# Altium PCB board.PcbDoc
Units mil, origin at the board's own origin, x right, y up, seen from the top; angles counter-clockwise.
Board outline 2980 x 2100 mil, 2 copper layers (Top Layer, Bottom Layer); 173 components, 98 nets, 438 pads, 89 vias.
Unrouted connection lines stored in the file: 3.
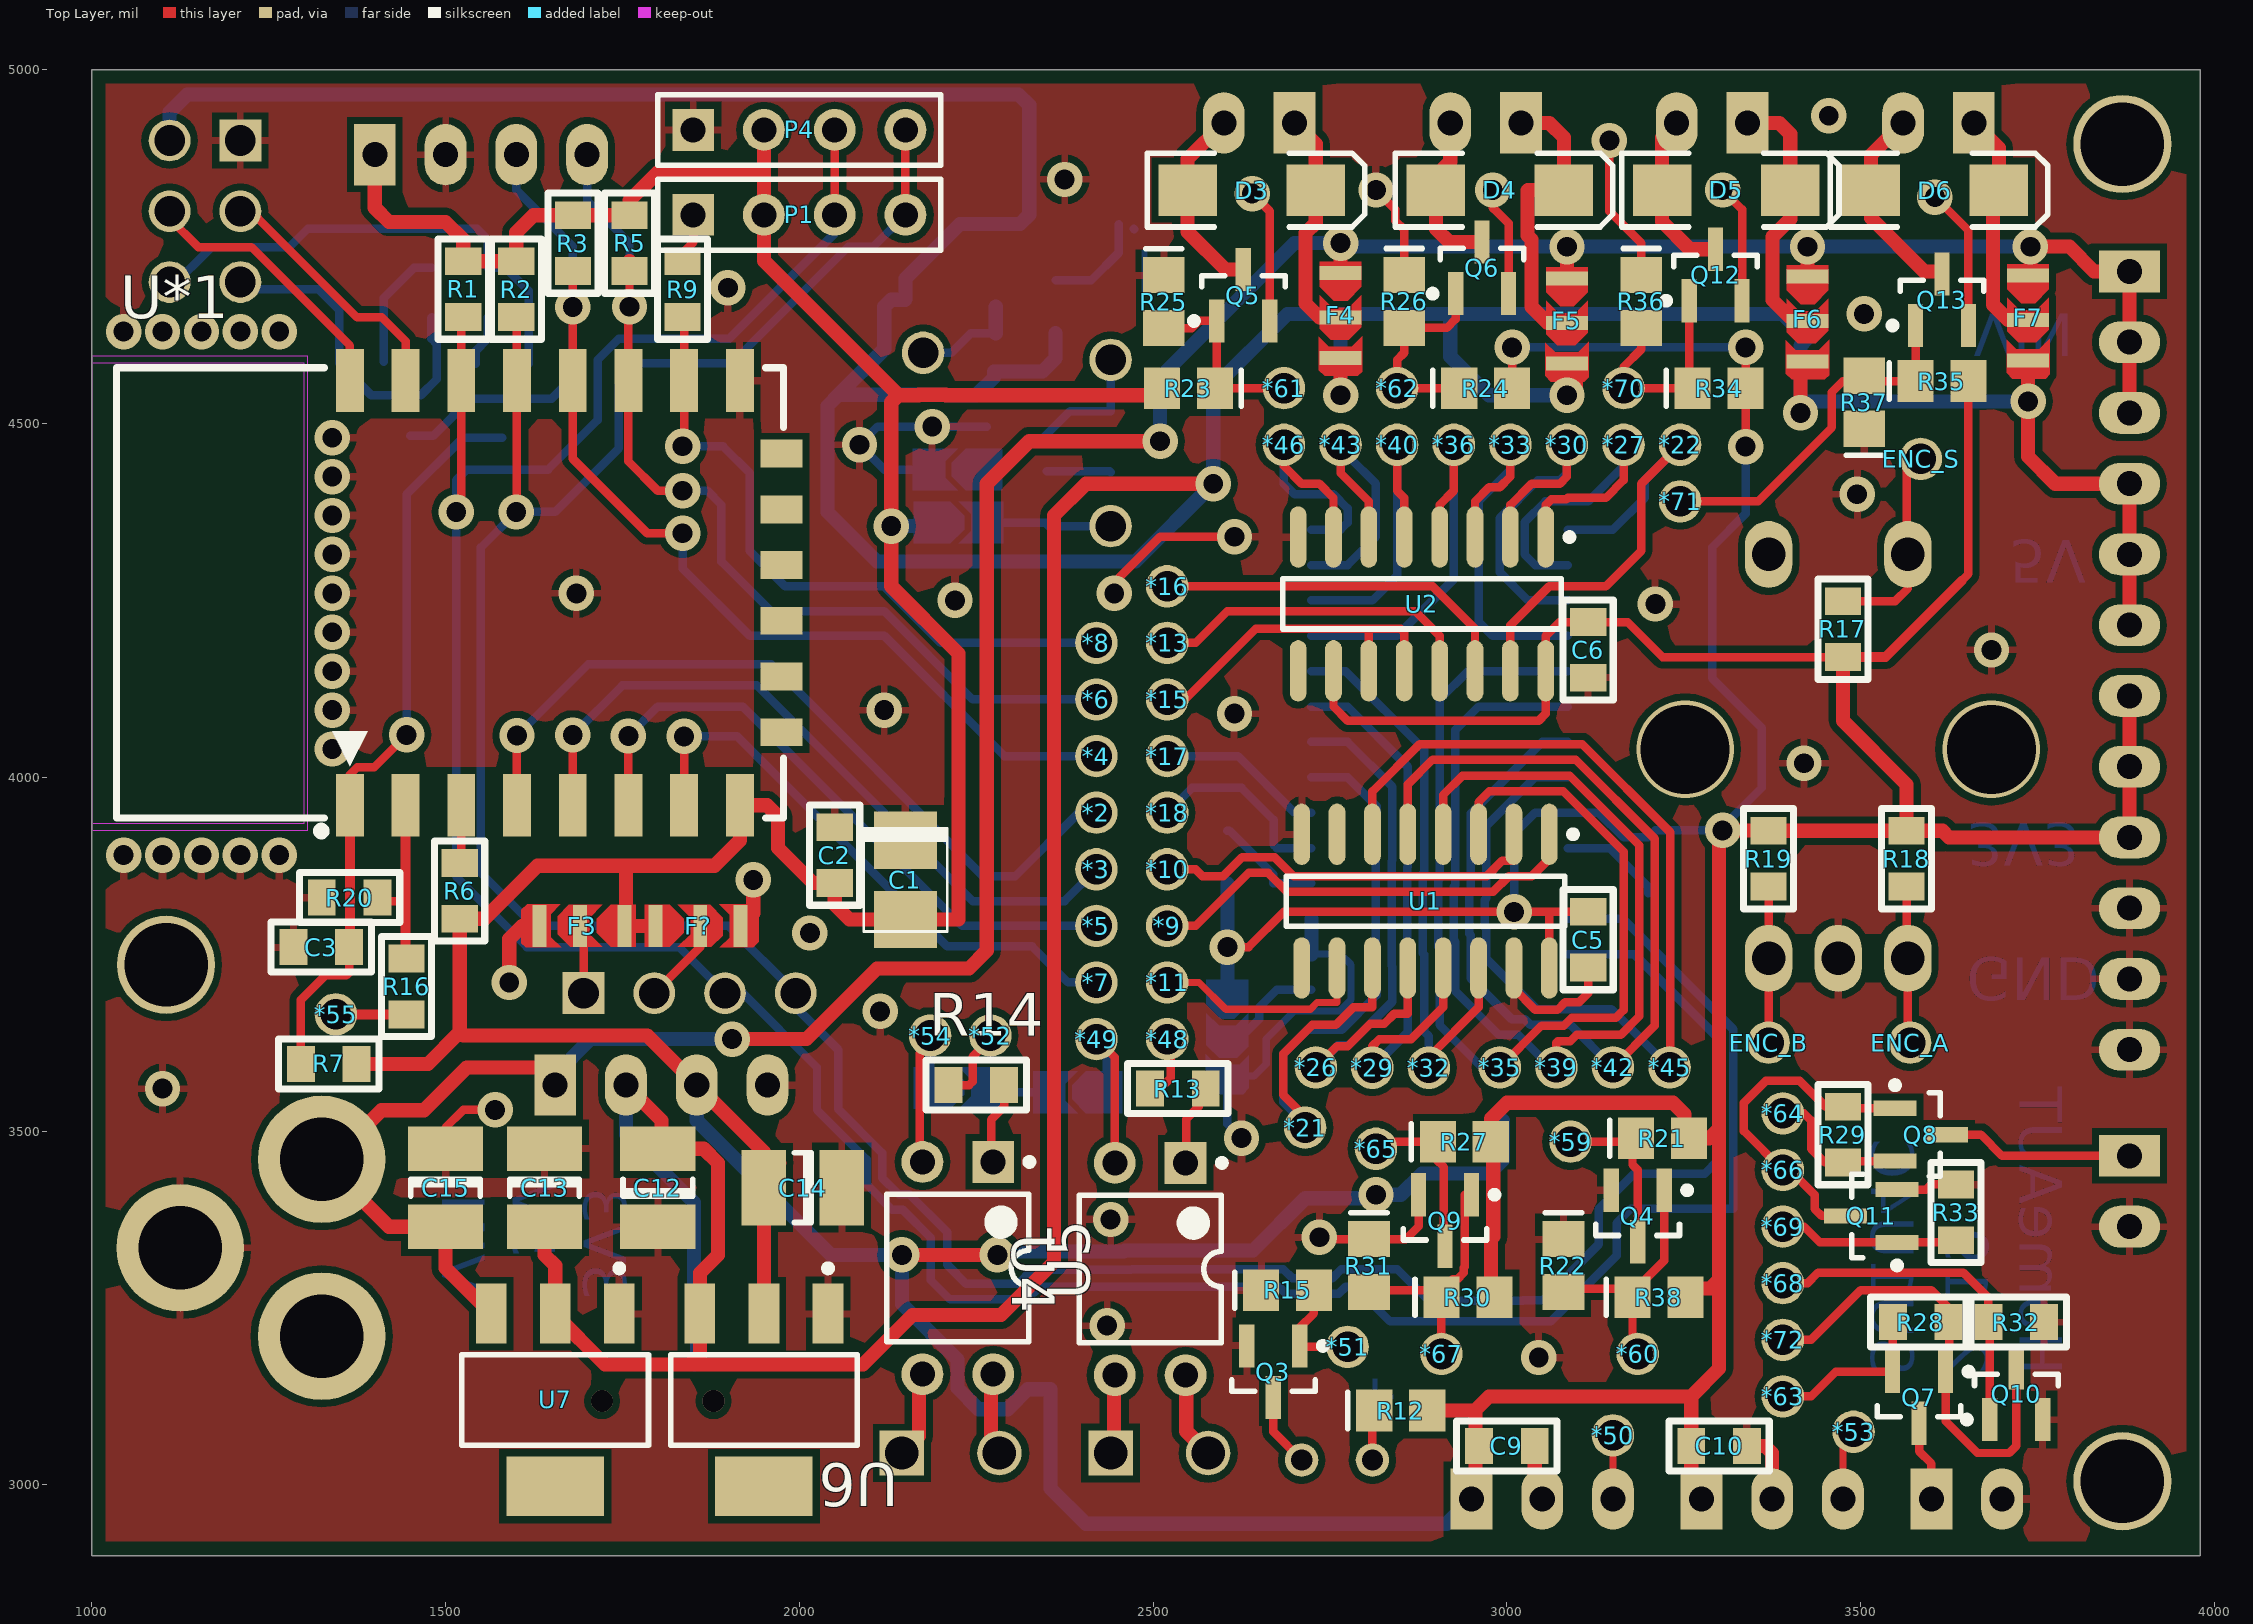
[diagram p0: Top Layer view]
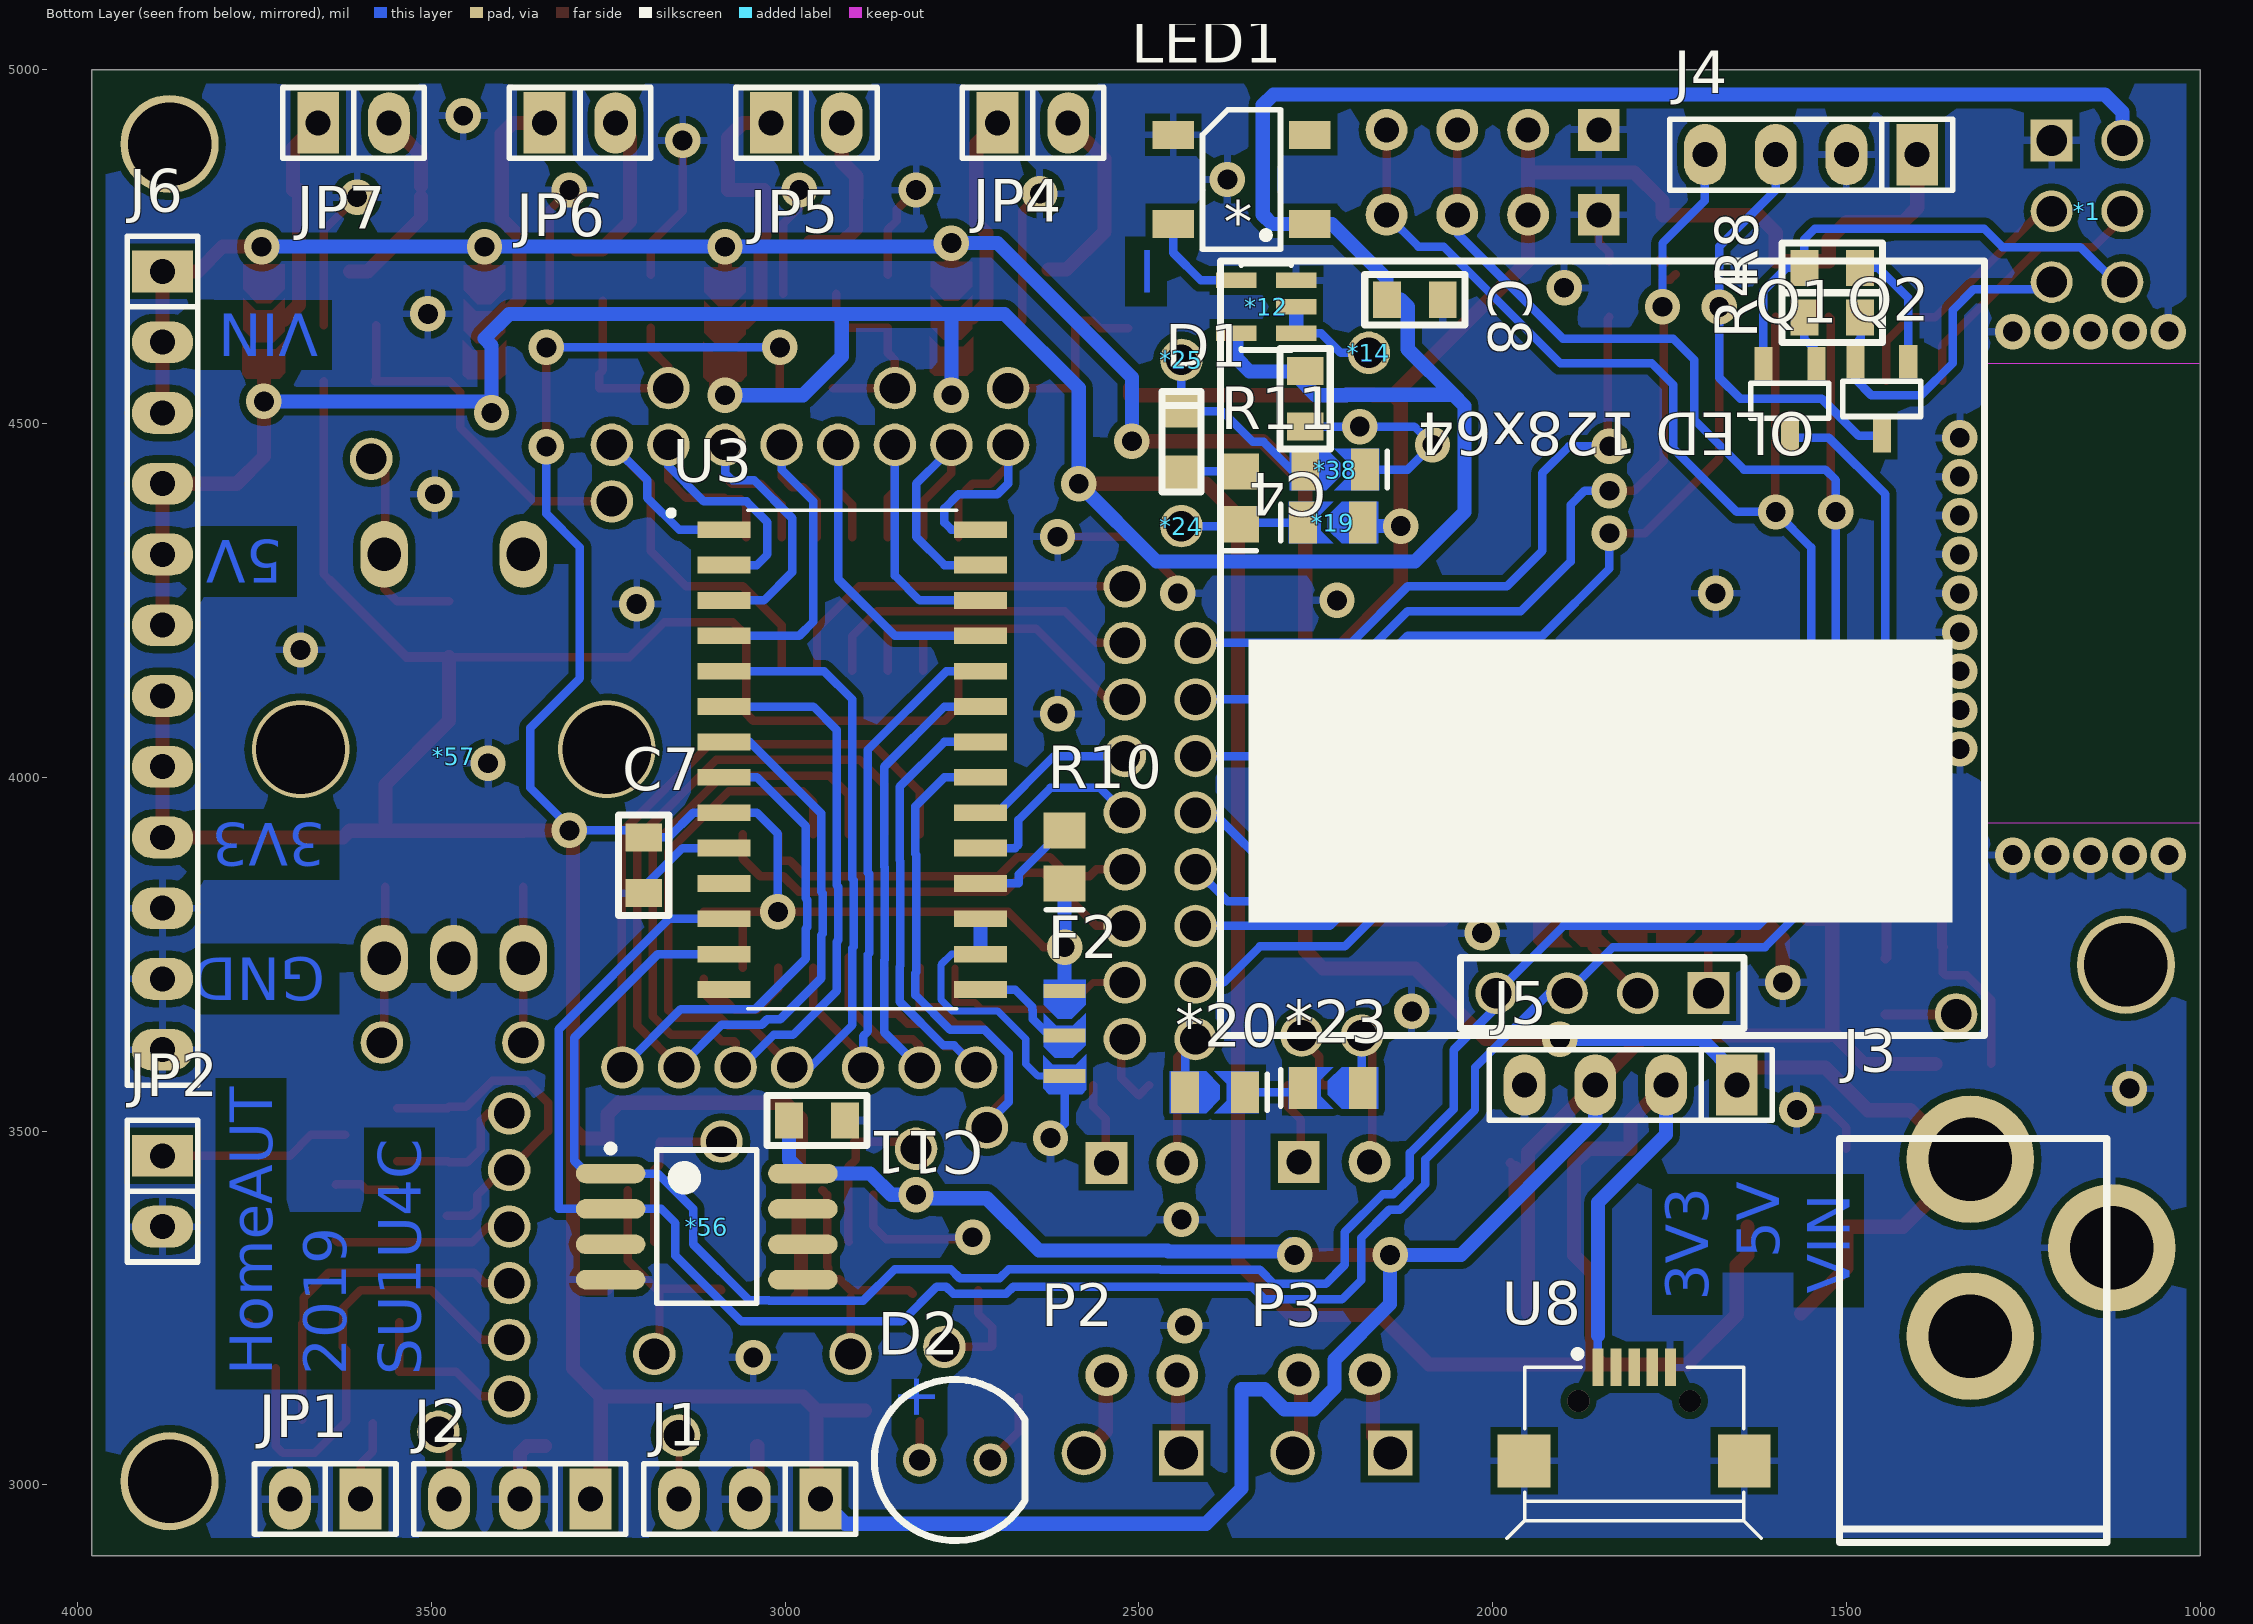
[diagram p1: Bottom Layer view, seen from below]

## Layer stack, top to bottom
Top Solder: solder mask 0.4, Solder Resist, Dk 3.5
Top Layer: signal copper 1.4
Dielectric 1: dielectric 12.6, FR-4, Dk 4.8
Bottom Layer: signal copper 1.4
Bottom Solder: solder mask 0.4, Solder Resist, Dk 3.5

## Board outline
1000,2900 3980,2900 3980,5000 1000,5000

## Design rules (kind name [scope] priority, off if disabled: settings)
Clearance [All] p1: gap=10 ignorepadtopadclearanceinfootprint=FALSE except(0: Arc-Hole Track-Hole SMDPad-Hole THPad-Hole Via-Hole Fill-Hole Poly-Hole Region-Hole Text-Hole)
PolygonConnect [All] p1: connectstyle=Relief reliefconductorwidth=10 reliefentries=4 polygonreliefangle="90 Angle" airgapwidth=10
RoomDefinition power [InComponentClass('power')] p1: confinementstyle=ConfineIn formatcopy=TRUE lockcomponents=FALSE outline 990,2890 2215,2890 2215,3695 990,3695
RoomDefinition peripheries [InComponentClass('peripheries')] p2: confinementstyle=ConfineIn formatcopy=TRUE lockcomponents=FALSE outline 2060,2890 4160,2890 4160,5000 2060,5000
RoomDefinition fetdrivers [InComponentClass('fetdrivers')] p3: confinementstyle=ConfineIn formatcopy=TRUE lockcomponents=FALSE outline 1500,2910 4150,2910 4150,4910 1500,4910
RoomDefinition core [InComponentClass('core')] p4: confinementstyle=ConfineIn formatcopy=TRUE lockcomponents=FALSE outline 3620,3010 3620,5005 1015,5005 1015,3010
RoutingVias [All] p1: holewidth=28 width=50 viastyle="Through Hole" minholewidth=28 minwidth=50 maxholewidth=28 maxwidth=50
SolderMaskExpansion [All] p1: expansion=4
Width [All] p1: maxlimit=20 minlimit=10 preferedwidth=12 minimp=50.000000 maximp=50.000000 favimp=50.000000
30 further rules are at their usual default settings.

## Classes and differential pairs
component class power: C12 C13 C14 C15 J3 J5 J6 U6 U7 U8
component class peripheries: * *9 *10 *11 *12 *13 *14 *15 *16 *17 *18 *19 *20 *21 *22 *23 *24 *25 *26 *27 *29 *30 *32 *33 *35 *36 *38 *39 *40 *42 *43 *45 *46 *48 *49 *50 *51 *52 *53 *54 *55 *56 *57 C4 C5 C6 C7 C8 C9 C10 C11 D1 D2 ENC_A ENC_B ENC_S F2 F3 F? J1 J2 J4 LED1 P1 P2 P3 P4 Q3 R10 R11 R12 R13 R14 R15 R16 R17 R18 R19 R20 U1 U2 U3 U4 U5
component class fetdrivers: *59 *60 *61 *62 *63 *64 *65 *66 *67 *68 *69 *70 *71 *72 D3 D4 D5 D6 F4 F5 F6 F7 JP1 JP2 JP4 JP5 JP6 JP7 Q4 Q5 Q6 Q7 Q8 Q9 Q10 Q11 Q12 Q13 R21 R22 R23 R24 R25 R26 R27 R28 R29 R30 R31 R32 R33 R34 R35 R36 R37 R38
component class core: *1 *2 *3 *4 *5 *6 *7 *8 C1 C2 C3 Q1 Q2 R1 R2 R3 R4 R5 R6 R7 R8 R9 U*1

## Components (designator, comment, footprint, x,y, rotation, side; value= is the part's Value field where it differs from the comment)
* "OLED_SCREEN" SCREEN 1695,3695 r90 bottom locked
*1 "Header6" HEADER6 1210,4900 r180 bottom
*2 "1Pin" Header1 2420,3950 r0 top
*3 "1Pin" Header1 2420,3870 r0 top
*4 "1Pin" Header1 2420,4030 r270 top
*5 "1Pin" Header1 2420,3790 r0 top
*6 "1Pin" Header1 2420,4110 r270 top
*7 "1Pin" Header1 2420,3710 r0 top
*8 "1Pin" Header1 2420,4190 r270 top
*9 "1Pin" Header1 2520,3790 r180 top
*10 "1Pin" Header1 2520,3870 r270 top
*11 "1Pin" Header1 2520,3710 r180 top
*12 "SingleGate" SOT23-5 2320,4665 r90 bottom
*13 "1Pin" Header1 2520,4190 r270 top
*14 "1Pin" Header1 2175,4600 r90 bottom
*15 "1Pin" Header1 2520,4110 r270 top
*16 "1Pin" Header1 2520,4270 r270 top
*17 "INTA" Header1 2520,4030 r180 top
*18 "INTB" Header1 2520,3950 r180 top
*19 "Forrszem" FORRSZEM 2225,4360 r180 bottom
*20 "Forrszem" FORRSZEM 2393.31,3555 r0 bottom
*21 "1Pin" Header1 2715,3505 r90 top
*22 "1Pin" Header1 3245,4470 r180 top
*23 "Forrszem" FORRSZEM 2225,3561 r180 bottom
*24 "1Pin" Header1 2440,4355 r180 bottom
*25 "1Pin" Header1 2440,4590 r180 bottom
*26 "1Pin" Header1 2730,3590 r180 top
*27 "1Pin" Header1 3165,4470 r180 top
*29 "1Pin" Header1 2809.8,3589.49 r180 top
*30 "1Pin" Header1 3085,4470 r180 top
*32 "1Pin" Header1 2889.8,3589.49 r180 top
*33 "1Pin" Header1 3005,4470 r180 top
*35 "1Pin" Header1 2990,3590 r270 top
*36 "1Pin" Header1 2925,4470 r180 top
*38 "Forrszem" FORRSZEM 2223.66,4435 r0 bottom
*39 "1Pin" Header1 3070,3590 r270 top
*40 "1Pin" Header1 2845,4470 r180 top
*42 "1Pin" Header1 3150,3590 r270 top
*43 "1Pin" Header1 2765,4470 r180 top
*45 "1Pin" Header1 3230,3590 r270 top
*46 "1Pin" Header1 2685,4470 r180 top
*48 "1Pin" Header1 2520,3630 r270 top
*49 "1Pin" Header1 2420,3630 r270 top
*50 "1Pin" Header1 3150,3070 r90 top
*51 "1Pin" Header1 2775,3195 r0 top
*52 "1Pin" Header1 2270,3635 r90 top
*53 "1Pin" Header1 3490,3075 r90 top
*54 "1Pin" Header1 2185,3635 r90 top
*55 "1Pin" Header1 1345,3665 r90 top
*56 "LM75 temp" SO8 3110.83,3365 r180 bottom
*57 "Encoder" Encoder 3468.43,3744.13 r180 bottom locked
*59 "1Pin" Header1 3090,3485 r90 top
*60 "1Pin" Header1 3185,3185 r180 top
*61 "1Pin" Header1 2685,4550 r90 top
*62 "1Pin" Header1 2845,4550 r180 top
*63 "1Pin" Header1 3390,3125 r90 top
*64 "1Pin" Header1 3390,3525 r90 top
*65 "1Pin" Header1 2815,3475 r180 top
*66 "1Pin" Header1 3390,3445 r90 top
*67 "1Pin" Header1 2907.6,3185 r180 top
*68 "1Pin" Header1 3390,3285 r90 top
*69 "1Pin" Header1 3390,3365 r90 top
*70 "1Pin" Header1 3165,4550 r180 top
*71 "1Pin" Header1 3245,4390 r90 top
*72 "1Pin" Header1 3390,3205 r90 top
C1 "100uF" FP_3528 2150,3855 r270 top
C2 "100nF" FP_0805_CAP_085 2050,3890 r270 top
C3 "100nF" FP_0805_CAP_085 1324.37,3760 r0 top
C4 "100nF" FP_0805_CAP_085 2265,4535 r90 bottom
C5 "100nF" FP_0805_CAP_085 3115,3770.63 r90 top
C6 "100nF" FP_0805_CAP_085 3115,4180 r90 top
C7 "100nF" FP_0805_CAP_085 3200,3875.63 r90 bottom
C8 "100nF" FP_0805_CAP_085 2110,4675 r0 bottom
C9 "100nF" FP_0805_CAP_085 3000,3055 r0 top
C10 "100nF" FP_0805_CAP_085 3300,3055 r0 top
C11 "100nF" FP_0805_CAP_085 2955,3515 r0 bottom
C12 "22uF" 1210 1800,3420 r90 top
C13 "Capacitor" 1210 1640,3420 r270 top value=10uf
C14 "Capacitor" 1210 2005,3420 r180 top value=22uf
C15 "10uf" 1210 1500,3420 r270 top
D1 "LED" FP_0805_LED_RED 2440,4435 r90 bottom
D2 "IR_LED" FP_LED_TH_RED 2876.93,2918.86 r180 bottom
D3 "Diode" DO214 2639.45,4830 r0 top
D4 "Diode" DO214 2990,4830 r0 top
D5 "Diode" DO214 3310,4830 r0 top
D6 "Diode" DO214 3605,4830 r0 top
ENC_A "1Pin" Header1 3570,3625 r90 top
ENC_B "1Pin" Header1 3370,3625 r90 top
ENC_S "1Pin" Header1 3585,4450 r90 top
F2 "" FORRSZEM3 2605,3666.5 r90 bottom
F3 "Forrszem_2" FORRSZEM3 1721.5,3790 r0 top
F4 "Forrszem_2" FORRSZEM3 2765,4681.5 r90 top
F5 "Forrszem_2" FORRSZEM3 3085,4673.58 r90 top
F6 "Forrszem_2" FORRSZEM3 3425,4676.5 r90 top
F7 "Forrszem_2" FORRSZEM3 3736.73,4677.83 r90 top
F? "Forrszem_2" FORRSZEM3 1828.5,3790 r180 top
J1 "IR_REC" THT_Male_P_1x3-2.54mm 2950,2980 r270 bottom
J2 "PIR" THT_Male_P_1x3-2.54mm 3275,2980 r270 bottom
J3 "2.xmm" FP_DC_TAP_ANYA 1325,3460 r0 bottom
J4 "THT_Male_P_1x4" THT_Male_P_1x4-2.54mm 1400,4880 r270 bottom
J5 "THT_Male_P_1x4" THT_Male_P_1x4-2.54mm 1655,3565 r270 bottom
J6 "THT_Male_P_1x12" THT_Male_P_1x12-2.54mm 3880,4715 r180 bottom
JP1 "THT_Male_P_1x2" THT_Male_P_1x2-2.54mm 3600,2980 r270 bottom
JP2 "THT_Male_P_1x2" THT_Male_P_1x2-2.54mm 3880,3465 r180 bottom
JP4 "THT_Male_P_1x2" THT_Male_P_1x2-2.54mm 2700,4925 r90 bottom
JP5 "THT_Male_P_1x2" THT_Male_P_1x2-2.54mm 3020,4925 r90 bottom
JP6 "THT_Male_P_1x2" THT_Male_P_1x2-2.54mm 3340,4925 r90 bottom
JP7 "THT_Male_P_1x2" THT_Male_P_1x2-2.54mm 3660,4925 r90 bottom
LED1 "WS2812B" PLCC4-LED 2355,4845 r0 bottom
P1 "I2C_2" HDR1X4 1850,4795 r0 top
P2 "Terminal block 1x2" "Sorkapolcs 1x2 3.5mm PCB" 2440,3045 r0 bottom
P3 "Terminal block 1x2" "Sorkapolcs 1x2 3.5mm PCB" 2145,3045 r0 bottom
P4 "I2C_1" HDR1X4 1850,4915 r0 top
Q1 "BC817" FP_SOT23-3 1580,4532.24 r90 bottom
Q2 "BC817" FP_SOT23-3 1450,4535 r90 bottom
Q3 "NMOS" SOT95P245X110-3N 2670,3160 r270 top
Q4 "NMOS" SOT95P245X110-3N 3185,3380 r270 top
Q5 "NMOS" SOT95P245X110-3N 2627.6,4681.42 r90 top
Q6 "NMOS" SOT95P245X110-3N 2965,4720 r90 top
Q7 "PMOS-2" SOT95P245X110-3N 3582.6,3123.58 r270 top
Q8 "PMOS-2" SOT95P245X110-3N 3585,3495 r0 top
Q9 "NMOS" SOT95P245X110-3N 2912.6,3373.58 r270 top
Q10 "NMOS" SOT95P245X110-3N 3720,3128.58 r90 top
Q11 "NMOS" SOT95P245X110-3N 3515,3380 r180 top
Q12 "NMOS" SOT95P245X110-3N 3295,4710 r90 top
Q13 "NMOS" SOT95P245X110-3N 3615,4675 r90 top
R1 "4K7" FP_0805_RES 1525,4690 r90 top
R2 "4K7" FP_0805_RES 1600,4690 r90 top
R3 "12K" FP_0805_RES 1680,4755 r270 top
R4 "12K" FP_0805_RES 1520,4650 r180 bottom
R5 "12K" FP_0805_RES 1760,4755 r270 top
R6 "12K" FP_0805_RES 1520,3839.37 r90 top
R7 "12K" FP_0805_RES 1335,3595 r180 top
R8 "12K" FP_0805_RES 1520,4720 r0 bottom
R9 "12K" FP_0805_RES 1835,4690 r270 top
R10 "Resistor" 0805 2605,3887.4 r90 bottom value=1K
R11 "Resistor" 0805 2360,4395 r90 bottom value=1K
R12 "Resistor" 0805 2850,3105 r0 top value=1K
R13 "1K" FP_0805_RES 2535,3560 r180 top
R14 "1K" FP_0805_RES 2250,3565 r180 top
R15 "Resistor" 0805 2690,3275 r0 top value=1K
R16 "1K" FP_0805_RES 1445,3704.37 r270 top
R17 "1K" FP_0805_RES 3475,4209.37 r270 top
R18 "1K" FP_0805_RES 3565,3885 r90 top
R19 "1K" FP_0805_RES 3370,3885 r90 top
R20 "1K" FP_0805_RES 1364.37,3830 r0 top
R21 "Resistor" 0805 3220,3490 r0 top value=1K
R22 "Resistor" 0805 3080,3310 r270 top value=1K
R23 "Resistor" 0805 2550,4550 r180 top value=1K
R24 "Resistor" 0805 2970,4550 r0 top value=1K
R25 "Resistor" 0805 2515,4672.4 r270 top value=1K
R26 "Resistor" 0805 2855,4672.6 r270 top value=1K
R27 "Resistor" 0805 2940,3485 r0 top value=1K
R28 "1K" FP_0805_RES 3585,3230 r180 top
R29 "1K" FP_0805_RES 3475,3495 r270 top
R30 "Resistor" 0805 2945,3265 r0 top value=1K
R31 "Resistor" 0805 2805,3310 r270 top value=1K
R32 "1K" FP_0805_RES 3720,3230 r180 top
R33 "1K" FP_0805_RES 3635,3385 r270 top
R34 "Resistor" 0805 3300,4550 r0 top value=1K
R35 "Resistor" 0805 3615,4560 r0 top value=1K
R36 "Resistor" 0805 3190,4672.6 r270 top value=1K
R37 "Resistor" 0805 3505,4530 r90 top value=1K
R38 "Resistor" 0805 3215,3265 r0 top value=1K
U1 "SN74HC165" D016_N 2885,3825 r270 top
U2 "SN74HC595D" D016_N 2880,4245 r270 top
U3 "MCP23017-E/SO" *SOIC127P1030X265-28N 2905,4025 r180 bottom locked
U4 "Optoisolator1" DIP-4 2495.98,3305 r270 top
U5 "Optoisolator1" DIP-4 2224.02,3306.38 r270 top
U6 "AMS1117" SOT-223 1950,3120 r180 top
U7 "L7805CV" SOT-223 1655,3120 r180 top
U8 "USB_Micro" USB_Micro_Standard 1800,3100 r90 bottom
U*1 "ESP-12-E" ESP_12_E 1364.76,3945.67 r90 top locked

## Footprints (in the part's own frame and the unit in brackets; to place one, negate y for a bottom-side part, rotate by r counter-clockwise, add the part's x,y. Pads: shape width x height; smd on the part's side, far side on the other; paste and mask are expansions set on the pad)
0805 [mm] "Chip Capacitor; Body 2.0 x 1.2 mm (LxW typ)"
  rect 1.3x1.5 smd: 1(-0.95,0) 2(0.95,0)
  silkscreen extent -1.9,-0.65 -1.9,0.65
1210 [mm] "Chip Capacitor; Body 3.2 x 2.5 mm (LxW typ)"
  rect 1.6x2.7 smd: 1(-1.4,0) 2(1.4,0)
  silkscreen extent -0.3,-1.25 0.3,1.25
*SOIC127P1030X265-28N [mm]
  rect 1.9x0.6 smd: 1(-4.605,8.255) 2(-4.605,6.985) 3(-4.605,5.715) 4(-4.605,4.445) 5(-4.605,3.175) 6(-4.605,1.905) 7(-4.605,0.635) 8(-4.605,-0.635) 9(-4.605,-1.905) 10(-4.605,-3.175) 11(-4.605,-4.445) 12(-4.605,-5.715) 13(-4.605,-6.985) 14(-4.605,-8.255) 15(4.605,-8.255) 16(4.605,-6.985) 17(4.605,-5.715) 18(4.605,-4.445) 19(4.605,-3.175) 20(4.605,-1.905) 21(4.605,-0.635) 22(4.605,0.635) 23(4.605,1.905) 24(4.605,3.175) 25(4.605,4.445) 26(4.605,5.715) 27(4.605,6.985) 28(4.605,8.255)
  silkscreen extent -6.61,-8.95 3.75,8.95
D016_N [mm] "SOIC, 16-Leads, Body 9.9x3.9mm, Pitch 1.27mm, IPC Medium Density"
  oval 2.2x0.6 smd: 1(-2.4,4.445) 2(-2.4,3.175) 3(-2.4,1.905) 4(-2.4,0.635) 5(-2.4,-0.635) 6(-2.4,-1.905) 7(-2.4,-3.175) 8(-2.4,-4.445) 9(2.4,-4.445) 10(2.4,-3.175) 11(2.4,-1.905) 12(2.4,-0.635) 13(2.4,0.635) 14(2.4,1.905) 15(2.4,3.175) 16(2.4,4.445)
  silkscreen extent -2.52,-5 0.9,5.42, body extent -1.95,-4.95 1.95,4.95, height 1.75
DIP-4 [mm] "DIP; 4 Leads; Row Spacing 7.62 mm; Pitch 2.54 mm"
  rect 1.5x1.5 hole 0.9: 1(-3.81,1.27)
  round 1.5 hole 0.9: 2(-3.81,-1.27) 3(3.81,-1.27) 4(3.81,1.27)
  silkscreen extent -3.93,-2.55 2.65,2.7, body extent -3.15,-2.5 3.15,2.5, height 5.6
DO214 [mm] "DO-214-AC/SMA; 2 C-Bend Leads; Body 5.3 x 2.6 mm, inc. leads (LxW)"
  rect 2.1x1.85 smd: 1(-2.3,0) 2(2.3,0)
  silkscreen extent -3.75,-1.33 4.05,1.33
Encoder [mm]
  oval 1.7x2.4 hole 1.2: A(-2.5,0) B(2.5,0) BTNA(-2.5,14.5) BTNB(2.5,14.5) COM(0,0)
ESP_12_E [mm] "ESP-12 Wi-Fi Module by AI-Thinker"
  rect 2.25x1 smd: 1(0.375,0) 2(0.375,-2) 3(0.375,-4) 4(0.375,-6) 5(0.375,-8) 6(0.375,-10) 7(0.375,-12) 8(0.375,-14) 15(15.625,-14) 16(15.625,-12) 17(15.625,-10) 18(15.625,-8) 19(15.625,-6) 20(15.625,-4) 21(15.625,-2) 22(15.625,0)
  rect 1x1.5 smd: 9(3,-15.5) 10(5,-15.5) 11(7,-15.5) 12(9,-15.5) 13(11,-15.5) 14(13,-15.5)
  silkscreen extent -0.7,-15.57 16.08,8.37, body extent 0,-15.49 16,8.51, height 2.75
FORRSZEM [mm] "Chip Capacitor; Body 2.0 x 1.2 mm (LxW typ)"
  rect 1x1.5 smd: 1(-1.1,0) 2(1.05,0)
  Top Layer region: 0.3,0.75 -0.2,0.25 -0.2,-0.25 0.3,-0.75 0.3,-0.75 1.6,-0.75 1.6,0.75
  Top Layer region: -1.6,0.75 -1.6,-0.75 0,-0.75 -0.45,-0.3 -0.45,0.3 0,0.75
  silkscreen extent -1.9,-0.65 -1.9,0.65
FORRSZEM3 [mm] "Chip Capacitor; Body 2.0 x 1.2 mm (LxW typ)"
  rect 0.5x1.5 smd: 1(-0.8,0) 2(0.8,0) 3(-2.25,0)
  Top Layer region: -1.5,0.775 -1.85,0.425 -1.85,-0.4 -1.475,-0.775 -2.75,-0.775 -2.9,-0.625 -2.9,0.575 -2.7,0.775
  Top Layer region: -1.6,0.35 -1.6,-0.3 -1.15,-0.75 0,-0.75 -0.45,-0.3 -0.45,0.3 0,0.75 -1.2,0.75
  Top Layer region: 0.3,0.75 -0.2,0.25 -0.2,-0.25 0.3,-0.75 1.2,-0.75 1.2,0.75
FP_0805_CAP_085 [mm] "0805 kapacitás YAGEO 0.85mm magas"
  rect 1x1.3 smd: 1(-1,0) 2(1,0)
  silkscreen extent -1.8,-0.9 1.8,0.9, body extent -1,-0.64 1.03,0.64, height 0.85
FP_0805_LED_RED [mm] "0805 méretû piros LED"
  rect 1.2x1.3 smd: A(-0.1,0) K(2.1,0)
  silkscreen extent -0.8,-0.7 2.8,0.7, body extent 0.01,-0.63 2.03,0.62, height 1.1
FP_0805_RES [mm] "0805 ellenállás"
  rect 1x1.3 smd: 1(-1,0) 2(1,0)
  silkscreen extent -1.8,-0.9 1.8,0.9, body extent -1,-0.62 1,0.63, height 0.62
FP_3528 [mm] "3528 TANTÁL SMD \"B\"-TOK"
  rect 2.05x2.25 smd: N(-1.425,0) P(1.425,0)
  silkscreen extent -1.85,-1.5 1.85,1.5, body extent -2.52,-1.5 2.48,1.5, height 2.11
FP_DC_TAP_ANYA [mil] "DC HEBA25 TÁPFESZÜLTSÉG ALJZAT ZÁRT, NYÁKBA 90°"
  round 180 hole 118: 1(0,0) 2(0,250) 3(-200,125)
  silkscreen extent -193,-30 185,541, body extent -190,-31 183,539, height 440
FP_LED_TH_RED [mm]
  round 1.2 hole 0.762: A(1.7,2.95) K(4.24,2.95)
  silkscreen extent 0.07,0.06 5.48,5.84, body extent 0,0 5.45,5.9, height 10.25
FP_SOT23-3 [mm] "SOT23-3 tok"
  rect 1.2x0.65 smd: 1(1.327,-0.95) 2(1.327,0.95) 3(-1.327,0)
  silkscreen extent -0.64,-1.4 0.63,1.4, body extent -1.27,-1.46 1.27,1.46, height 0.97
HDR1X4 [mm] "Connector; Header; 4 Position"
  rect 1.5x1.5 hole 0.9: 1(0,0)
  round 1.5 hole 0.9: 2(2.54,0) 3(5.08,0) 4(7.62,0)
  silkscreen extent -1.27,-1.27 8.89,1.27
Header1 [mil]
  round 60 hole 43.31: 1(0,0)
HEADER6 [mm]
  rect 1.5x1.5 hole 1.1: 1(0,0)
  round 1.5 hole 1.1: 2(2.54,0) 3(0,-2.54) 4(2.54,-2.54) 5(0,-5.08) 6(2.54,-5.08)
PLCC4-LED [mm] "For WS2812B"
  rect 1.5x1 smd: 1(-2.45,1.6) 2(-2.45,-1.6) 3(2.45,-1.6) 4(2.45,1.6)
  silkscreen extent -1.4,-2.5 1.4,2.5, body extent -2.5,-2.5 2.5,2.5, height 1.61
SCREEN [mm] "OLED screen"
  rect 1.5x1.5 hole 1.1: 1(0,0)
  round 1.5 hole 1.1: 2(0,2.54) 3(0,5.08) 4(0,7.62)
  silkscreen extent -1.52,-9.91 26.29,17.53, body extent -1.4,-1.27 1.27,8.89, height 8.54
SO8 [mm] "SOP, 8-Leads, Body 5.3x5.3mm, Pitch 1.27mm, IPC Low Density"
  oval 2.5x0.7 smd: 1(-3.45,1.905) 2(-3.45,0.635) 3(-3.45,-0.635) 4(-3.45,-1.905) 5(3.45,-1.905) 6(3.45,-0.635) 7(3.45,0.635) 8(3.45,1.905)
  silkscreen extent -3.57,-2.75 1.8,2.93, body extent -2.73,-2.75 2.73,2.75, height 2.16
"Sorkapolcs 1x2 3.5mm PCB" [mm]
  rect 1.6x1.6 hole 1.2: 1(0,0)
  round 1.6 hole 1.2: 2(3.5,0)
  body extent -1.83,-3.77 5.28,3.52, height 8.53
SOT23-5 [mm] "SOT-23/SC-74A; 5 Leads; Body 3 x 3 mm, inc. leads (LxW max)"
  rect 0.55x1.45 smd: 1(-0.95,-1.075) 2(0,-1.075) 3(0.95,-1.075) 4(0.95,1.075) 5(-0.95,1.075)
  silkscreen extent -1.57,-1.35 1.55,0.9
SOT95P245X110-3N [mm] "SOT23, 3-Leads, Body 3.0x2.6mm (max), Pitch 0.95mm, IPC Medium Density"
  rect 1.55x0.55 smd: 1(-0.925,0.95) 2(-0.925,-0.95) 3(0.925,0)
  silkscreen extent -1.05,-1.5 0.7,1.9, body extent -0.7,-1.5 0.7,1.5, height 1.1
SOT-223 [mm] "SOT-223/SC-73; 4 Leads; Body 6.7 x 7.3 mm, inc. leads (LxW max)"
  rect 1.1x2.15 smd: 1(-2.3,-3.1) 2(0,-3.1) 3(2.3,-3.1)
  rect 3.5x2.15 smd: 4(0,3.1)
  silkscreen extent -3.35,-4.85 3.35,1.63
THT_Male_P_1x2-2.54mm [mm] "THT Male pin header strip 1x2 2.54mm pitch"
  rect 2.2x1.5 hole 0.9: 1(0,0)
  oval 2.2x1.5 hole 0.9: 2(0,-2.54)
  silkscreen extent -1.27,-3.81 1.27,1.27, body extent -1.46,-3.81 1.46,1.27, height 8.51
THT_Male_P_1x3-2.54mm [mm] "THT Male pin header strip 1x3 2.54mm pitch"
  rect 2.2x1.5 hole 0.9: 1(0,0)
  oval 2.2x1.5 hole 0.9: 2(0,-2.54) 3(0,-5.08)
  silkscreen extent -1.27,-6.35 1.27,1.27, body extent -1.46,-6.35 1.46,1.27, height 8.51
THT_Male_P_1x4-2.54mm [mm] "THT Male pin header strip 1x4 2.54mm pitch"
  rect 2.2x1.5 hole 0.9: 1(0,0)
  oval 2.2x1.5 hole 0.9: 2(0,-2.54) 3(0,-5.08) 4(0,-7.62)
  silkscreen extent -1.27,-8.89 1.27,1.27, body extent -1.46,-8.89 1.46,1.27, height 8.51
THT_Male_P_1x12-2.54mm [mm] "THT Male pin header strip 1x12 2.54mm pitch"
  rect 2.2x1.5 hole 0.9: 1(0,0)
  oval 2.2x1.5 hole 0.9: 2(0,-2.54) 3(0,-5.08) 4(0,-7.62) 5(0,-10.16) 6(0,-12.7) 7(0,-15.24) 8(0,-17.78) 9(0,-20.32) 10(0,-22.86) 11(0,-25.4) 12(0,-27.94)
  silkscreen extent -1.27,-29.21 1.27,1.27, body extent -1.46,-29.21 1.46,1.27, height 8.51
USB_Micro_Standard [mm] "Micro USB Dock 5 Pin Standard"
  rect 1.35x0.4 smd: 1(1.679,1.3) 2(1.679,0.65) 3(1.679,0) 4(1.679,-0.65) 5(1.679,-1.3)
  rect 1.9x1.9 smd: 6(-1.679,-3.95) 7(-1.679,3.95)
  silkscreen extent -4.46,-4.57 2.29,4.57, body extent -4.32,-3.99 1.11,3.99, height 2.67

## Part data
*17 *18: library part 1Pin
C1: library part CAP_ELECT, "Polarized Capacitor"
C2 C4 C5 C6 C7 C8 C9 C10 C11 C12 C15: library part CAP, "Capacitor"
C3: library part "CAP 100nF", "Capacitor", Tolerance=+80%/-20%, Voltage=25V, Name="SMD Multilayer Ceramic Capacitor, 0805", Reference=1759167, Supplier=Farnell
C13 C14: "Ceramic Chip Capacitor - Standard", PackageDocument=Mar-2001, Code_IPC=2012[0805], Code_JEITA=0805, ComponentLink1Description="Manufacturer Link", ComponentLink1URL=http://www.kemet.com/, ComponentLink2Description=Datasheet, ComponentLink2URL=http://www.kemet.com/kemet/web/homepage/kechome.nsf/vapubfilesname/F3102TA.pdf/$file/F3102TA.pdf, DatasheetDocument=Mar-2001, LatestRevisionDate=19-Mar-2004, LatestRevisionNote="Silkscreen size reduced.", Note="Footprint corresponds to dimensions for bulk cassette packaging. This case size has tightened tolerances.", PackageReference=0805, Published=17-Jul-2002, Publisher="Altium Limited"
D1: "Typical RED GaAs LED"
D2: library part LED, "Typical RED GaAs LED"
F2: library part Forrszem_2
J1 J2: library part THT_Male_P_1x3, "THT Male pin header strip 1x3"
J3: library part DC_TAP_ANYA, "2.xmm DC HEBA25 TÁPFESZÜLTSÉG ALJZAT ZÁRT, NYÁKBA 90°", Supplier="Lomex 43-07-67"
J4 J5: "THT Male pin header strip 1x4"
J6: "THT Male pin header strip 1x12"
JP1 JP2 JP4 JP5 JP6 JP7: "THT Male pin header strip 1x2"
LED1: "WorldSemi WS2812B Smart RGB LED", 1.Manufacturer=WorldSemi, 2.MfgNo=WS2812B, 3.Supplier=WorldSemi, 4.CatNo=WS2812B, 9.UnitCost=0.15
P1 P4: library part "Header 4", "Header, 4-Pin", LatestRevisionDate=17-Jul-2002, LatestRevisionNote="Re-released for DXP Platform.", Publisher="Altium Limited"
P2 P3: library part "Sorkapocs PCB 1x2 3.5mm"
Q1 Q2: "NPN General-purpose Transistor", ComponentLink1Description="Manufacturer Link", ComponentLink1URL=http://www.semiconductors.philips.com/, ComponentLink2Description=Datasheet, ComponentLink2URL=http://www.semiconductors.philips.com/acrobat/datasheets/BC817_BC817W_BC337_5.pdf
Q3 Q4 Q5 Q6 Q9 Q10 Q11 Q12 Q13: "N-Channel Power MOSFET", Code_JEDEC=TO-220-AB, ComponentLink1Description="Manufacturer Link", ComponentLink1URL=http://www.irf.com/, DatasheetDocument=PD-9.814, LatestRevisionDate=17-Jul-2002, LatestRevisionNote="Re-released for DXP Platform.", Note="Pin 2 is electrically connected to pin 4.", PackageReference=TO-220AB, Published=8-Jun-2000, Publisher="Altium Limited"
Q7 Q8: "P-Channel Power MOSFET", ComponentLink1Description="Manufacturer Link", ComponentLink1URL=http://www.irf.com/, DatasheetVersion=PD-9.390D, LatestRevisionDate=17-Jul-2002, LatestRevisionNote="Re-released for DXP Platform.", Note="Pin 4 not drawn and electrically connected to Pin 2.", PackageDescription="TO, Thru-Hole, Vertical, Heatsink Mounted; 3 In-Line Leads; Pitch 2.54 mm", PackageReference=TO-220AB, PackageVersion=Feb-1997, Published=8-Jun-2000, Publisher="Altium Limited"
R1 R2 R13 R14 R16 R17 R18 R19 R20 R28 R29 R32 R33: library part RES, "Resistor"
R3 R4 R5 R6 R7 R8 R9: library part "RES 12K", "Resistor", Power=125mW, Tolerance=5%, Name="YAGEO (PHYCOMP)  RC0805JR-0712KL  SMD Chip Resistor, Thick Film, 12 kohm", Reference=9234144, Supplier=Farnell
U1: "8-Bit Parallel-Load Shift Register", Code_IPC=SOIC127P600-16, ComponentLink1Description="Manufacturer Link", ComponentLink1URL=http://www.ti.com/, ComponentLink2Description=Datasheet, ComponentLink2URL=http://www-s.ti.com/sc/ds/sn74hc166.pdf, DatasheetVersion=May-1997, LatestRevisionDate=13-Apr-2006, LatestRevisionNote="IPC-7351 Footprint Added.", PackageDescription="16-Pin Small Outline Integrated Circuit 1.27 mm Pitch", PackageReference=D016, PackageVersion=Jan-1998, Published=8-Jun-2000, Publisher="Altium Limited"
U2: "8-Bit Shift Register with 3-State Output Registers", Code_IPC=SOIC127P600-16, ComponentLink1Description="Manufacturer Link", ComponentLink1URL=http://www.ti.com/, ComponentLink2Description=Datasheet, ComponentLink2URL=http://www-s.ti.com/sc/ds/sn74hc595.pdf, DatasheetVersion=May-1997, LatestRevisionDate=13-Apr-2006, LatestRevisionNote="IPC-7351 Footprint Added.", PackageDescription="16-Pin Small Outline Integrated Circuit 1.27 mm Pitch", PackageReference=D016, PackageVersion=Jan-1998, Published=8-Jun-2000, Publisher="Altium Limited"
U3: "MCP23017 Series 5.5 V 1.7 MHz SMT 16-Bit I2C I/O Expander - SOIC-28", Package="SOIC-28 Microchip", Availability=Unavailable, MF=Microchip, MP=MCP23017-E/SO, Price=None, SnapEDA_Link=https://www.snapeda.com/parts/MCP23017-E/SO/Microchip/view-part/?ref=snap
U4 U5: "4-Pin Phototransistor Optocoupler", DatasheetVersion=Nov-2003, LatestRevisionDate=04-Mar-2005, LatestRevisionNote="Sch pins 3 & 4 Swapped.", PackageReference=DIP-4, Published=24-Mar-1999, Publisher="Altium Limited"
U6: "AMS1117 1A LOW DROPOUT VOLTAGE REGULATOR"
U7: "Positive Voltage Regulator", ComponentLink1Description="Manufacturer Link", ComponentLink1URL=http://www.st.com/, DatasheetVersion=Dec-1998, LatestRevisionDate=17-Jul-2002, LatestRevisionNote="Re-released for DXP Platform.", Note="Tab is connected to pin 3 (GND).", PackageDescription="TO, Thru-Hole, Vertical, Heatsink Mounted; 3 In-Line Leads; Pitch 2.54 mm; Pin sequence 1, 3, 2", PackageReference=TO220ABN, PackageVersion=Jun-1998, Published=24-Aug-2001, Publisher="Altium Limited"
U8: "USB micro female"
U*1: library part ESP12-E
*56: Farnell=8455970, Lomex=56-04-14
D3 D4 D5 D6: Code_JEDEC=DO-204-AH, ComponentLink1Description="Manufacturer Link", ComponentLink1URL=http://www.vishay.com/, ComponentLink2Description=Datasheet, ComponentLink2URL=http://www.vishay.com/docs/85588/85588.pdf, DatasheetDocument=6-Aug-1999, LatestRevisionDate=17-Jul-2002, LatestRevisionNote="Re-released for DXP Platform.", PackageReference=DO-35, Published=8-Jun-2000, Publisher="Altium Limited"
R10 R11 R12 R15 R21 R22 R23 R24 R25 R26 R27 R30 R31 R34 R35 R36 R37 R38: LatestRevisionDate=17-Jul-2002, LatestRevisionNote="Re-released for DXP Platform.", PackageReference=AXIAL-0.4, Published=8-Jun-2000, Publisher="Altium Limited"

## Free pads (board coordinates)
  round 138.74 hole 118.11: 2(1105,3735) 3(3870,3005) 4(3870,4895)

## Via types
v1: diameter 50, hole 28, Top Layer to Bottom Layer, 85 vias
v2: diameter 31.5, hole 31.5, Top Layer to Bottom Layer, 2 vias
v3: diameter 137.8, hole 125.98, Top Layer to Bottom Layer, 2 vias

## Nets (pads, with @x,y where several pads share a name; then routed paths per layer and width w, separated by ;. In a path a pad name is that pad's centre, name@x,y a point inside that pad or via, vN(x,y) a via of type N, cw(c..) or ccw(c..) an arc to the next point about the centre after c; other vN are vias at no path point)
3V3: *19.2 *56.8 C1.P C2.2 C5.2 C6.2 C7.2 C9.1 C10.1 C11.2 C14.2 F2.2 F3.2 F?.2 J1.1 J2.1 J4.1 J5.3 J6.7 J6.8 J6.9 P1.2 P4.2 R1.2 R2.2 R3.1 R5.1 R6.1 R7.1 R10.1 R12.2 R17.2 R18.2 R19.2 R21.2 R23.2 R24.2 R27.2 R30.2 R34.2 R35.2 R38.2 U1.16 U2.10 U2.16 U3.9 U6.2 U*1.8 | length 14147.8
  Top Layer w12: v1(2605,3760) 2635,3760 2684.78,3809.78 v1(3010.22,3809.78) 3010.43,3810 3060,3810 ; U2.10 2755,4100 2775,4080 3045,4080 3055,4090 U2.16 3055,4200 3074.37,4219.37 C6.2 3170.63,4219.37 3220,4170 R17.2 ; R24.2 v1(3007.4,4607.6) ; U1.16 3060,3810 ; C5.2 3060,3810 ; v1(3337.4,4467.4) R34.2 v1(3337.4,4607.6) ; 3642.4,4277.4 3652.4,4287.4 R35.2
  Top Layer w14: C14.2@1967.6,3447.6 C14.2@1975,3455 ; R17.2 3535,4170 3642.4,4277.4
  Top Layer w20: R7.1 1475,3595 1520,3640 ; J4.1 1400,4805 1420,4785 1500,4785 1525,4760 R1.2 R2.2 1600,4770 1624.37,4794.37 R3.1 1759.37,4794.37 1760,4795 1760,4815 1800,4855 1950,4855 ; 1740,3790 F3.2 ; 1755,3865 1755,3792.01 F3.2 ; F?.2 F3.2 ; U6.2 1949.88,3242.17 C14.2 1949.88,3470.12 J5.3 1785,3635 1525,3635 1520,3640 ; P4.2 1950,4855 ; C14.2@1967.6,3407.4 C14.2@1967.6,3447.6 ; v1(2145,3325) v1(2280,3325) ; R23.2 2512.6,4540 2207.08,4540 2206.45,4540.63 2169.18,4540.63 2168.55,4540 2140,4540 ; R12.2 2955,3105 2955.63,3105.63 ; J1.1 2955.63,2985.63 2955.63,3105.63 ; R30.2 2977.4,3270 2977.4,3347.4 2980.83,3350.83 2980.83,3481.57 R27.2 2977.4,3517.4 3000,3540 3235,3540 3251.22,3523.78 3251.22,3487.4 3253.11,3489.29 3285.55,3489.29 3300,3503.74 ; R38.2@3252.4,3277.4 3287.4,3277.4 3300,3290 ; J2.1@3280.63,2985.63 J2.1 3260.63,2994.37 C10.1 3260.63,3125 ; R17.2 3475,4080 3565,3990 R18.2 ; J6.7 J6.9 3625,3915 3615.63,3924.37 R18.2 ; 1520,3640 R6.1 1555,3800 1630,3875 1880,3875 1915.94,3910.94 U*1.8 1954.57,3960.43 1970,3945 1970,3900 2019.37,3850.63 C2.2 2050,3820 2071.1,3798.9 C1.P 2225,3798.9 2225,4175 2130,4270 v1(2130,4355) 2130,4530 2140,4540 ; 1950,4855 P1.2 1950,4730 2140,4540 ; 2955.63,3105.63 2975,3125 3260.63,3125 ; 3260.63,3125 3300,3164.37 3300,3290 ; 3300,3290 3300,3503.74 ; 3300,3503.74 3300,3920 v1(3305,3925) 3369.37,3925 R19.2 R18.2
  Bottom Layer w12: v1(3007.4,4607.6) v1(3337.4,4607.6) ; v1(3010.22,3809.78) 3010.22,3920.22 3040,3950 U3.9 3130,3950 3165,3915 C7.2 3210,3925 v1@3300,3925 ; v1(3305,3925) v1@3300,3925 ; v1(3337.4,4467.4) 3337.4,4372.4 3290,4325 3290,4140 3360,4070 3360,3985 v1@3300,3925
  Bottom Layer w20: J5.3 1855,3515 2045,3325 v1(2145,3325) 2145,3255.44 2223.54,3176.89 2223.54,3136.81 2253.5,3106.85 2294.53,3106.85 2322.68,3135 2355,3135 2355,2995 2405,2945 2915,2945 J1.1 ; v1(2130,4355) 2178.66,4355 *19.2 ; v1(2280,3325) 2280,3335 2285.25,3340.25 2295.5,3330 2458.64,3330 2459.64,3331 2641,3331 2715,3405 2810,3405 v1(2815,3410) 2850,3410 2880,3440 *56.8 2994.37,3459.37 C11.2 ; 2605,3680 F2.2 v1(2605,3760) R10.1
5V: *1.2 *12.5 C4.2 C8.2 C12.2 C13.2 F4.3 F5.3 F6.3 F7.3 J5.2 J6.4 J6.5 J6.6 LED1.1 U6.3 U7.2 U8.1 | length 8682.2
  Top Layer w20: C13.2 1640,3325 1655,3310 U7.2 1655,3240.34 1725.34,3170 1845,3170 ; J5.2 1805,3515 1805,3475.12 1864.88,3475.12 1885,3455 1885,3325 1859.45,3299.45 U6.3 1859.45,3184.45 1845,3170 ; v1(2585,4415) 2405,4415 2360,4370 2360,3315 2285,3240 2160,3240 2090,3170 1845,3170 ; v1(2765,4540) F4.3 ; v1@3097.64,4532.68 F5.3@3097.64,4575.45 ; v1(3415,4515) 3415,4577.91 F6.3 ; F7.3 v1(3736.73,4531.34) 3736.73,4453.27 3775,4415 J6.4 J6.6
  Bottom Layer w12: U8.1 1851.18,3211.18
  Bottom Layer w20: *1.2@1110,4890 *1.2 1110,4940 1135,4965 2310,4965 2325,4950 2325,4795 2312.01,4782.01 LED1.1 2227.01,4782.01 2150,4705 2150,4675.63 C8.2 2130,4675 2120,4665 2120,4605 2055.63,4540.63 ; J5.2 1755,3495 1851.18,3398.82 1851.18,3211.18 ; *12.5 2362.32,4592.32 2343.74,4573.74 2275,4573.74 2275,4565 2250,4540 2207.08,4540 2206.45,4540.63 2055.63,4540.63 ; v1(2765,4540) 2765,4655 ; v1(3085,4540) 2975,4540 2920,4595 2920,4655 ; v1(3415,4515) v1@3415,4530 ; v1(3736.73,4531.34) 3416.34,4531.34 v1@3415,4530 ; 2055.63,4540.63 2040,4525 2040,4375 2110,4305 2475,4305 v1(2585,4415) 2585,4550 2690,4655 2765,4655 ; 2765,4655 2920,4655 ; 2920,4655 3390,4655 3425,4620 3415,4610 v1@3415,4530
DTR: *1.5 Q2.2 R4.2 | length 483.7
  Bottom Layer w12: *1.5@1210,4690 1320,4690 1350,4660 1350,4585 1395,4540 1465,4540 1487.4,4562.4 Q2.2 1487.4,4612.6 1480,4620 1480,4649.37 R4.2
EN: R6.2 U*1.3 | length 82.6
  Top Layer w12: R6.2 1522.24,3880.98 U*1.3
GND: *1.1 *12.3 *20.1 *23.1 *38.1 *56.4 *57.COM C1.N C2.1 C3.1 C4.1 C5.1 C6.1 C7.1 C8.1 C9.2 C10.2 C11.1 C12.1 C13.1 C14.1 C15.1 F2.3 F3.3 F?.3 J1.2 J2.2 J3.3 J4.2 J5.4 J6.10 J6.11 J6.12 JP1.2 JP2.2 LED1.3 P1.1 P4.1 Q3.2 Q4.2 Q5.2 Q6.2 Q9.2 Q10.2 Q11.2 Q12.2 Q13.2 R9.1 R15.1 R20.1 R22.1 R25.1 R26.1 R31.1 R32.1 R33.1 R36.1 R37.1 U1.8 U1.15 U2.8 U3.10 U3.16 U3.17 U6.1 U7.1 U8.5 U8.6 U8.7 U*1.15 | length 3296.4
  Top Layer w12: C15.1 1500,3505 1525,3530 v1(1570,3530) ; R9.1 1835,4741 1850,4756 P1.1 ; v1(2445,4260) 2445,4275 2510,4340 v1(2615,4340) ; v1(2640,4825) 2665,4800 Q5.2 ; v1(2735,3350) 2737.6,3347.4 R31.1 2857.4,3347.4 2875.2,3365.2 Q9.2 ; v1(2815,4830) 2842.11,4802.89 2842.11,4786.96 2855,4774.07 R26.1 ; 2980,4805 2982.07,4802.93 2982.45,4802.93 3002.4,4782.98 Q6.2 ; U1.15 3010,3701.3 3040.09,3671.2 3071.52,3671.2 3082.31,3682 3102,3682 3115,3695 C5.1@3115,3715.63 ; v1(3145,4900) 3145,4800 3190,4755 R36.1 ; v1(3305,4830) 3332.4,4802.6 Q12.2 ; Q11.2 3592.4,3417.4 3600,3425 3634.37,3425 R33.1 ; v1(3605,4820) 3652.4,4772.6 Q13.2 ; R32.1@3757.4,3228.03 R32.1
  Top Layer w20: v1(1590,3710) 1590,3771.69 1608.31,3790 F3.3 ; F?.3 1935,3807.91 v1(1935,3855) v1@1940,3855 ; C9.2 3039.37,2990.63 J1.2 ; C10.2 3365,3055 3375,3045 J2.2
  Bottom Layer w10: F2.3 2642.91,3577.91 2660,3595 2660,3630 2700,3670 2764.13,3670 2780,3685.87 2780,3735 2765,3750 U3.16
  Bottom Layer w12: *38.1 2120,4435 v1(2085,4470) 2110.63,4495.63 v1(2187.82,4495.63) C4.1 ; *23.1 2274.31,3555 *20.1 ; F2.3 2605,3510 v1(2625,3490) ; U3.10 3145,3900 3200,3845 C7.1
  Bottom Layer w20: v1(2625,3490) v1@2625,3495 ; U3.16 U3.17
  other v1: 3045,3180 2435,3225 2440,3375 1100,3560 2114.14,3669.1 2015,3780 1045,3890 1100,3890 1155,3890 1210,3890 1265,3890 3420,4020 1340,4040 2615,4090 1340,4095 2120,4095 1340,4150 3685,4180 1340,4205 3210,4245 2220,4250 1340,4260 1685,4260 1340,4315 1340,4370 3495,4400 1340,4425 1340,4480 1045,4630 1100,4630 1155,4630 1210,4630 1265,4630 3505,4655 1899,4692 2980,4830 2375,4845 3455,4935
GPIO0: *4.1 J4.3 Q2.3 R3.2 U*1.18 | length 1821.1
  Top Layer w12: R3.2 1680,4665 v1(1679.72,4664.72) U*1.18 1679.72,4450.28 1785,4345 v1(1835,4345)
  Bottom Layer w12: Q2.3 1482.76,4482.76 1535,4535 1650,4535 1679.72,4564.72 v1(1679.72,4664.72) 1679.72,4750.28 1600,4830 J4.3 ; v1(1835,4345) 1835,4295 1930,4200 2120,4200 2290,4030 *4.1
GPIO2: *6.1 J4.4 R5.2 U*1.17 | length 1366.7
  Top Layer w12: R5.2@1741.62,4710.99 1749.23,4703.37 1760,4703.37 v1(1760,4665) 1758.46,4663.46 U*1.17 1758.46,4446.54 1800,4405 v1(1835,4405)
  Bottom Layer w12: J4.4 1700,4815 1760,4755 v1(1760,4665) ; v1(1835,4405) 1870,4405 1890,4385 1890,4305 1960,4235 2120,4235 2245,4110 *6.1
GPIO15: *8.1 R9.2 U*1.16 | length 949.2
  Top Layer w12: v1(1835,4467.8) 1837.2,4470 U*1.16 1837.2,4648.43 R9.2
  Bottom Layer w12: v1(1835,4467.8) 1892.2,4467.8 1930,4430 1930,4320 1980,4270 2120,4270 2200,4190 *8.1
GPIO16: *2.1 U*1.4 | length 1121
  Top Layer w12: U*1.4 v1(1600.98,4059.02)
  Bottom Layer w12: v1(1600.98,4059.02) 1701.97,4160 1960,4160 2260,3860 2305,3860 2395,3950 *2.1
IN_1: *21.1 U1.11 U3.21 | length 988.1
  Top Layer w12: *21.1@2720,3515 2684,3551 2684,3609.05 2724.95,3650 2758.14,3650 2783.14,3675 2810,3675 U1.11
  Bottom Layer w12: U3.21 2775,4000 2816,3959 2816,3891.77 2815,3890.77 2815,3724.23 2816,3723.23 2816,3692.11 2767.01,3643.12 2718.07,3643.12 2684,3609.05 2684,3541 2703.07,3521.93 2718.07,3521.93 *21.1@2730,3510
IN_2: *26.1 U1.12 U3.22 | length 818
  Top Layer w12: *26.1 2760,3620 2775.26,3620 2807.26,3652 2827,3652 2840.89,3665.89 2860,3665.89 U1.12
  Bottom Layer w12: U3.22 2775,4050 2838,3987 2838,3882.66 2837,3881.66 2837,3733.34 2838,3732.34 2838,3682.74 2776.38,3621.12 2761.12,3621.12 *26.1
IN_3: *29.1 U1.13 U3.23 | length 842.5
  Top Layer w12: *29.1 2809.8,3619.8 2820,3630 2865,3630 2910,3675 U1.13 U1.13@2910,3745.51
  Bottom Layer w12: U3.23 2775,4100 2860,4015 2860,3873.55 2859,3872.55 2859,3742.45 2860,3741.45 2860,3639.68 *29.1
IN_4: *32.1 U1.14 U3.24 | length 829.4
  Top Layer w12: *32.1 2889.8,3604.8 2960,3675 U1.14
  Bottom Layer w12: U3.24 2772.11,4150 2883,4039.11 2883,3865.43 2881,3863.43 2881,3751.57 2883,3749.57 2883,3640.89 2889.8,3634.08 *32.1
IN_5: *35.1 U1.3 U3.5 | length 1493.8
  Top Layer w12: U1.3 2960,3965 2975,3980 3080,3980 3165,3895 3165,3671.11 3153.89,3660 3091.43,3660 3080.63,3649.2 3049.2,3649.2 *35.1
  Bottom Layer w12: *35.1 2965,3590 2905,3650 2905,3758.68 2903,3760.68 2903,3854.32 2905,3856.32 2905,4110 2945,4150 U3.5
IN_6: *39.1 U1.4 U3.6 | length 1527.3
  Top Layer w12: U1.4 2910,3975 2937,4002 3089.11,4002 3187,3904.11 3187,3662 3161,3636 3098.54,3636 3089.74,3627.2 3072.2,3627.2 3070,3625 *39.1
  Bottom Layer w12: *39.1@3060,3590 *39.1@3062.23,3590 ; *39.1 *39.1@3062.23,3590 ; U3.6 2960,4100 2927,4067 2927,3847.21 2925,3845.21 2925,3769.79 2927,3767.79 2927,3698 2989,3636 3016.23,3636 *39.1@3062.23,3590
IN_7: *42.1 U1.5 U3.7 | length 1495
  Top Layer w12: U1.5 2860,3990 2895,4025 3097.23,4025 3209,3913.23 3209,3649 *42.1
  Bottom Layer w12: U3.7 3050,4050 2949,3949 2949,3838.1 2947,3836.1 2947,3778.9 2949,3776.9 2949,3716 3007,3658 3025.35,3658 3033.16,3650.19 3089.81,3650.19 *42.1
IN_8: *45.1 U1.6 U3.8 | length 1549.3
  Top Layer w12: U1.6 2810,3980 2877,4047 3106.34,4047 3231,3922.34 3231,3591 *45.1
  Bottom Layer w12: U3.8 3040,4000 2971,3931 2971,3828.98 2969,3826.98 2969,3788.02 2971,3786.02 2971,3743.46 3042.27,3672.19 3147.81,3672.19 *45.1
Net*3_1: *3.1 U*1.5 | length 1013.7
  Top Layer w12: U*1.5 v1(1679.72,4059.72)
  Bottom Layer w12: v1(1679.72,4059.72) 1750,4130 1940,4130 2245,3825 2375,3825 *3.1
Net*5_1: *5.1 U*1.6 | length 905.2
  Top Layer w12: U*1.6 v1(1758.46,4058.46)
  Bottom Layer w12: v1(1758.46,4058.46) 1800,4100 1920,4100 2230,3790 *5.1
Net*7_1: *7.1 U*1.7 | length 824.2
  Top Layer w12: U*1.7 v1(1837.2,4057.8)
  Bottom Layer w12: v1(1837.2,4057.8) 1912.2,4057.8 2209,3761 2329,3761 2380,3710 *7.1
Net*9_1: *9.1 U1.1 | length 636.1
  Top Layer w12: *9.1 2560,3790 2635,3865 2662.55,3865 2689.37,3838.18 2980.63,3838.18 3002.63,3860.18 3035.18,3860.18 3060,3885 U1.1
Net*10_1: *10.1 U1.2 | length 562.7
  Top Layer w12: *10.1 2560,3870 2569.82,3860.18 2599.07,3860.18 2625.89,3887 2671.66,3887 2698.48,3860.18 2971.52,3860.18 2993.52,3882.18 3010,3882.18 U1.2
Net*11_1: *11.1 U1.10 | length 308.5
  Top Layer w10: *11.1 2565,3710 2602.8,3672.2 2722.51,3672.2 2731.86,3681.56 2760,3681.56 U1.10
Net*12_1: *12.1 *12.2 *14.1 | length 121.5
  Bottom Layer w12: 2205,4600 2215,4600 2242.6,4627.6 *12.1
  Bottom Layer w20: *12.1 *12.2
Net*12_4: *12.4 LED1.4 | length 146.4
  Bottom Layer w12: *12.4 2412.4,4702.4 2451.45,4741.45 LED1.4 ; LED1.4@2472.91,4775 LED1.4@2473.27,4774.65
Net*13_1: *13.1 U2.13 | length 467.6
  Top Layer w12: *13.1 2560,4190 2605,4235 2870,4235 2905,4200 U2.13
Net*15_1: *15.1 U2.11 U2.12 | length 499.2
  Top Layer w12: *15.1@2525,4105 *15.1 2545,4110 2644.82,4209.82 2805,4209.82 ; U2.11 2805,4209.82 ; U2.12 2855,4205 2850.18,4209.82 2805,4209.82
Net*16_1: *16.1 U2.14 | length 519.3
  Top Layer w12: *16.1 2895,4270 2955,4210 U2.14
Net*17_1: *17.1 U3.20 | length 236.8
  Bottom Layer w12: *17.1 2620,4030 2700,3950 U3.20
Net*18_1: *18.1 U3.19 | length 273.9
  Bottom Layer w12: *18.1 2555,3985 2625,3985 2670.3,3939.7 2670.3,3904.7 2675,3900 U3.19
Net*19_1: *19.1 *24.1 R11.1 | length 176.9
  Bottom Layer w12: *19.1@2265,4359.65 2347.95,4359.65 2350,4357.6 2352.6,4355 *24.1
Net*20_2: *20.2 *49.1 U4.2 | length 275.8
  Top Layer w12: *49.1 2445.98,3604.02 U4.2
  Bottom Layer w12: *49.1 2434.65,3615.35 *20.2 ; *20.2@2440,3561.34 *20.2@2446.34,3555
Net*23_2: *23.2 *54.1 U5.2 | length 210.6
  Top Layer w12: U5.2@2170,3480 *54.1@2170,3610
  Bottom Layer w12: *23.2@2183.66,3555 2185,3556.34 *54.1
Net*25_1: *25.1 *38.2 D1.K | length 281.6
  Bottom Layer w12: *38.2 2284.85,4435 2323.84,4473.99 2338.99,4473.99 2382.68,4517.68 D1.K *25.1
Net*48_1: *48.1 R13.2 | length 131.9
  Top Layer w12: R13.2@2485.63,3565 2500.32,3550.32 2525,3575 2525,3615 2510,3630 *48.1 *48.1@2525,3630
Net*50_1: *50.1 J1.3 | length 70
  Top Layer w10: J1.3 *50.1@3150,3050
Net*51_1: *51.1 Q3.1 R15.2 | length 155.1
  Top Layer w12: R15.2 2727.4,3242.4 2707.4,3222.4 Q3.1 2708.82,3195 *51.1
Net*52_1: *52.1 R14.2 | length 106.8
  Top Layer w12: R14.2 2240,3565 2245,3570 2245,3605 *52.1@2270,3630
Net*53_1: *53.1 J2.3 | length 115
  Top Layer w10: J2.3 *53.1@3475,3095
Net*55_1: *55.1 R16.2 | length 100
  Top Layer w14: *55.1 R16.2
Net*56_SCL: *56.2 *.3 P1.3 P4.3 R1.1 U3.12 U*1.20 | length 4539.8
  Top Layer w12: v1(1515,4375) 1522.24,4382.24 U*1.20 1522.24,4647.87 R1.1 ; P1.3 P4.3
  Bottom Layer w12: P1.3 2050,4769 1901,4620 1745,4620 1715,4590 1715,4505 1645,4435 1530,4435 1515,4420 v1(1515,4375) 1515,3860 1615,3760 1830,3760 *.3 1920,3695 2025,3590 2025,3530 2095,3460 2095,3425 2131.15,3388.85 2146.15,3388.85 2186,3349 2186,3289 2213,3262 2322,3262 2340,3280 2677.72,3280 2687.72,3270 2762.28,3270 2772.28,3280 2785.9,3280 2834.9,3231 3062.11,3231 3155,3323.89 3155,3370 3175,3390 *56.2 3320,3390 3320,3644 3164,3800 U3.12
Net*56_SDA: *56.1 *.4 P1.4 P4.4 R2.1 U3.13 U*1.19 | length 4384.7
  Top Layer w12: v1(1600,4375) 1600.98,4375.98 U*1.19 1600.98,4649.65 R2.1 ; P1.4 P4.4
  Bottom Layer w12: P1.4 2105,4750 2069.39,4750 1904.39,4585 1775,4585 1745,4555 1745,4465 1655,4375 v1(1600,4375) 1550,4325 1550,3865 1625,3790 1900,3790 *.4 1995,3675 2055,3615 2055,3531.11 2117,3469.11 2117,3434.11 2140.26,3410.85 2155.26,3410.85 2209,3357.11 2209,3311 2236,3284 2309,3284 2329,3304 2469.41,3304 2470.41,3305 2683.83,3305 2696.83,3292 2753.17,3292 2766.17,3305 2845,3305 2889.78,3260.22 3022.77,3260.22 3023.13,3260.58 3050.58,3260.58 3130,3340 3130,3390 3180,3440 *56.1 3280,3440 3298,3458 3298,3632 3180,3750 U3.13
Net*57_A: *57.A ENC_A.1 R18.1 | length 222.7
  Top Layer w12: R18.1 3565,3745.98 *57.A 3566.85,3628.15 ENC_A.1
Net*57_B: *57.B ENC_B.1 R19.1 | length 220.6
  Top Layer w12: ENC_B.1 *57.B R19.1
Net*57_BTNA: *57.BTNA ENC_S.1 R17.1 | length 268.3
  Top Layer w12: R17.1 3548.74,4248.74 3566.85,4266.85 *57.BTNA 3565,4316.85 ENC_S.1@3565,4435
Net*59_1: *59.1 Q4.3 R21.1 | length 232.1
  Top Layer w12: *59.1 3105,3485 3177.6,3485 3177.6,3452.4 3185,3445 Q4.3
Net*60_1: *60.1 Q4.1 R22.2 R38.1 | length 346.8
  Top Layer w12: R22.2@3090,3275 3092.4,3277.4 3177.6,3277.4 R38.1@3177.6,3272.21 ; *60.1 3177.6,3192.4 R38.1 R38.1@3177.6,3272.21 ; Q4.1 3222.4,3317.02 R38.1@3177.6,3272.21
Net*61_1: *61.1 Q5.1 R23.1 R25.2 | length 273.1
  Top Layer w12: R25.2 2555,4635 2565,4645 Q5.1 2590.2,4552.79 R23.1 *61.1
Net*62_1: *62.1 Q6.1 R24.1 R26.2 | length 290.7
  Top Layer w12: Q6.1 2927.6,4647.6 2915.2,4635.2 R26.2 2855,4600 2845,4590 *62.1 R24.1
Net*63_1: *63.1 Q7.2 R28.2 | length 239.9
  Top Layer w12: *63.1 3430,3125 3465,3160 Q7.2 3545.63,3160.43 R28.2
Net*64_1: *64.1 Q8.2 R29.2 | length 211.6
  Top Layer w12: *64.1 3420,3525 3430,3515 3430,3475 3449.37,3455.63 R29.2 3476.97,3457.6 Q8.2
Net*65_1: *65.1 Q9.3 R27.1 | length 238.1
  Top Layer w12: *65.1 2825,3485 R27.1@2900,3485 ; R27.1 R27.1@2900,3485 ; Q9.3@2910,3343.58 2911,3344.58 2911,3449 2900,3460 R27.1@2900,3485
Net*66_1: *66.1 Q8.1 Q11.3 R29.1 | length 487.4
  Top Layer w12: Q11.3 3445,3380 3435,3390 3435,3410 3400,3445 *66.1 3335,3500 3335,3540 3366,3571 3414,3571 3450.63,3534.37 R29.1 3476.97,3532.4 Q8.1
Net*67_1: *67.1 Q9.1 R30.1 R31.2 | length 346.4
  Top Layer w12: R31.2@2820,3270 2825,3275 2907.6,3275 2923.25,3290.65 2930.05,3290.65 2939.42,3300.03 2939.42,3306.83 2940.81,3308.21 2940.81,3409.83 Q9.1@2947.4,3416.42 ; *67.1@2907.6,3177.4 *67.1 R30.1 ; *67.1@2910,3190 *67.1@2915.1,3184.9
Net*68_1: *68.1 Q10.1 R32.2 | length 484.6
  Top Layer w12: *68.1 3425,3285 3440,3300 3645,3300 3680.63,3264.37 R32.2 3682.6,3228.03 Q10.1
Net*69_1: *69.1 Q11.1 R33.2 | length 255.5
  Top Layer w12: *69.1 3420,3365 3442.4,3342.6 Q11.1 3631.97,3342.6 R33.2
Net*70_1: *70.1 Q12.1 R34.1 R36.2 | length 318.8
  Top Layer w12: R36.2 3190,4605 3165,4580 *70.1 R34.1 3262.6,4570 3257.6,4575 Q12.1
Net*71_1: *71.1 Q13.1 R35.1 R37.2 | length 514.3
  Top Layer w12: *71.1 3355,4390 3459.47,4494.47 3459.47,4544.47 3475,4560 R35.1 3580,4560 3577.6,4562.4 Q13.1
Net*72_1: *72.1 Q7.1 Q10.3 R28.1 | length 669.2
  Top Layer w12: *72.1 3430,3205 3500,3275 3600,3275 3624.37,3250.63 R28.1 3625,3229.37 3625,3195 3620,3190 Q7.1 3620,3090 3665,3045 3710,3045 3720,3055 Q10.3
Net*_1: *.1 F3.1 | length 97.1
  Top Layer w12: F3.1 1695,3785 *.1
Net*_2: *.2 F?.1 | length 121.9
  Top Layer w12: *.2 1860,3760 F?.1
NetD1_1: D1.A R11.2 | length 90.6
  Bottom Layer w12: R11.2@2350,4432.4 2438.66,4432.4 D1.A
NetD2_1: D2.A R12.1 | length 69.1
  Top Layer w12: R12.1@2810,3090 D2.A D2.A@2820,3045
NetD2_2: D2.K Q3.3 | length 112.2
  Top Layer w12: Q3.3 2670,3075 D2.K D2.K@2715,3040
NetD3_1: D3.1 JP4.2 Q5.3 | length 275.8
  Top Layer w20: JP4.2 2548.9,4873.9 2548.9,4820 2548.9,4771.1 2602.17,4717.83 Q5.3
NetD3_2: D3.2 F4.1 JP4.1 | length 331.5
  Top Layer w20: JP4.1 2730,4895 D3.2 2730,4783.64 2715.47,4769.11 2715.47,4669.53 2735,4650 F4.1
NetD4_1: D4.1 JP5.2 Q6.3 | length 231.4
  Top Layer w20: JP5.2 2920,4870 2899.45,4849.45 D4.1 2899.45,4820 2900,4819.45 2900,4775 2918.58,4756.42 Q6.3
NetD4_2: D4.2 F5.1 JP5.1 | length 421.3
  Top Layer w20: JP5.1 3060,4925 3080.55,4904.45 D4.2 3030,4830 3029.21,4829.21 3029.21,4765.79 3035,4760 3035,4665 3057.91,4642.09 F5.1
NetD5_1: D5.1 JP6.2 Q12.3 | length 239.7
  Top Layer w20: JP6.2 3219.45,4904.45 D5.1 3219.45,4785.55 3258.58,4746.42 Q12.3
NetD5_2: D5.2 F6.1 JP6.1 | length 374.1
  Top Layer w20: JP6.1 3385,4925 3400.55,4909.45 D5.2 3400.55,4789.19 3375.47,4764.11 3375.47,4674.53 3405,4645 F6.1
NetD6_1: D6.1 JP7.2 Q13.3 | length 269.6
  Top Layer w20: D6.1@3514.45,4820 3514.45,4790.55 3590,4715 Q13.3@3615,4715 ; D6.1@3514.45,4835.55 3514.45,4879.45 JP7.2
NetD6_2: D6.2 F7.1 JP7.1 | length 338.7
  Top Layer w20: JP7.1 3695.55,4889.45 D6.2 3687.2,4830 3687.2,4667.8 3708.66,4646.34 F7.1
NetF2_1: F2.1 U3.15 | length 155.4
  Bottom Layer w12: F2.1 2626.65,3635 2650,3658.35 2650,3670.62 2650.53,3671.15 2650.53,3675.53 2675,3700 U3.15
NetJP1_1: JP1.1 Q7.3 | length 114.4
  Top Layer w12: Q7.3 3582.6,3047.4 3600,3030 JP1.1
NetJP2_1: JP2.1 Q8.3 | length 271
  Top Layer w12: Q8.3 3670,3495 3700,3465 JP2.1
NetP2_1: P2.1 U4.3 | length 85.7
  Top Layer w20: P2.1 2445,3050 U4.3@2445,3128.62
NetP2_2: P2.2 U4.4 | length 96.4
  Top Layer w20: U4.4@2546.97,3128.62 2546.97,3075.83 P2.2
NetP3_1: P3.1 U5.3 | length 93.6
  Top Layer w20: P3.1 2169.02,3069.02 U5.3@2169.02,3128.62
NetP3_2: P3.2 U5.4 | length 88.5
  Top Layer w20: U5.4@2270.98,3128.62 2270.98,3056.81 P3.2
NetQ1_1: Q1.1 R4.1 | length 72.5
  Bottom Layer w12: Q1.1 1542.6,4602.6 1559.37,4619.37 R4.1
NetQ2_1: Q2.1 R8.1 | length 175.9
  Bottom Layer w12: Q2.1 1412.6,4677.6 1455,4720 R8.1
NetR10_2: R10.2 U3.18 | length 157.2
  Bottom Layer w12: R10.2 2607.94,3924.8 2670,3862.75 2670,3850 U3.18
NetR13_1: R13.1 U4.1 | length 90.8
  Top Layer w12: U4.1@2546.97,3481.38 2546.97,3516.97 2564.37,3534.37 R13.1@2564.37,3565
NetR14_1: R14.1 U5.1 | length 91.2
  Top Layer w12: U5.1@2270.98,3481.38 2270.98,3515.98 2289.37,3534.37 R14.1
NetR16_1: R16.1 R20.2 U*1.2 | length 257.1
  Top Layer w12: R20.2@1403.74,3825 1443.5,3825
  Top Layer w14: U*1.2 1443.5,3825 1443.5,3745.24 R16.1
nRST: C3.2 Q1.3 R7.2 U*1.1 | length 1066.6
  Top Layer w12: R7.2 1295.63,3685.63 1330,3720 1360,3720 1363.74,3723.74 C3.2 ; U*1.1 1364.76,4003.76 1375,4014 1399,4014 v1(1445,4060)
  Top Layer w14: C3.2 1364.76,3761.02 U*1.1
  Bottom Layer w12: v1(1445,4060) 1445,4400 1525,4480 Q1.3
OUT_1: *22.1 U2.15 U3.1 | length 688.8
  Top Layer w12: U2.15 3005,4215 3060,4270 3140,4270 3190,4320 3190,4415 *22.1
  Bottom Layer w12: U3.1 3150,4350 3195,4395 3195,4420 *22.1
OUT_2: *27.1 U2.1 U3.2 | length 536
  Top Layer w12: U2.1 3055,4385 3063,4393 3084.11,4393 3086.11,4395 3140,4395 3165,4420 *27.1
  Bottom Layer w12: U3.2 3040,4300 3025,4315 3025,4360.54 3054.46,4390 3115,4390 3165,4440 *27.1
OUT_3: *30.1 U2.2 U3.3 | length 537.5
  Top Layer w12: U2.2 3005,4385 3035,4415 3075,4415 3085,4425 *30.1
  Bottom Layer w12: *30.1 3085,4430 3075,4420 3043.89,4420 2990,4366.11 2990,4290 3030,4250 U3.3
OUT_4: *33.1 U2.3 U3.4 | length 563.2
  Top Layer w12: U2.3 2955,4390 2975,4410 2990,4410 3005,4425 *33.1
  Bottom Layer w12: *33.1 3005,4435 2960,4390 2960,4220 2980,4200 U3.4
OUT_5: *36.1 U2.4 U3.25 | length 563.2
  Top Layer w12: U2.4 2905,4385 2925,4405 *36.1
  Bottom Layer w12: U3.25 2845,4200 2925,4280 *36.1
OUT_6: *40.1 U2.5 U3.26 | length 455.5
  Top Layer w12: *40.1 2845,4405 2855,4395 U2.5
  Bottom Layer w12: U3.26 2810,4250 2845,4285 *40.1
OUT_7: *43.1 U2.6 U3.27 | length 406.9
  Top Layer w12: *43.1 2765,4430 2805,4390 U2.6
  Bottom Layer w12: U3.27 2775,4300 2815,4340 2815,4415 2777.1,4452.9 2777.1,4460 2775,4460 *43.1
OUT_8: *46.1 U2.7 U3.28 | length 409.1
  Top Layer w12: *46.1 2685,4440 2710,4415 2735,4415 2755,4395 U2.7
  Bottom Layer w12: *46.1 2685,4415 2700,4400 2755,4400 2775,4380 2775,4360 2765,4350 U3.28
RTS: *1.6 Q1.2 R8.2 | length 705.7
  Bottom Layer w12: *1.6@1110,4690 1169.47,4749.47 1279.47,4749.47 1305,4775 1545,4775 1559.37,4760.63 R8.2 1585,4720 1617.4,4687.6 Q1.2
RXD: *1.3 U*1.21 | length 361
  Top Layer w12: *1.3@1210,4790 1235,4790 1375,4650 1410,4650 1443.5,4616.5 U*1.21
TXD: *1.4 U*1.22 | length 378.6
  Top Layer w12: *1.4@1110,4790 1150.53,4749.47 1225.53,4749.47 1364.76,4610.24 U*1.22
VIN: C15.2 F4.2 F5.2 F6.2 F7.2 J3.1 J5.1 J6.1 J6.2 J6.3 U7.3 | length 4342.8
  Top Layer w14: 3085,4695 F5.2 F5.2@3085,4707.99
  Top Layer w20: J3.1@1295,3460 J3.1@1300,3455 ; U7.3 1500,3306.5 C15.2 1420.12,3364.88 J3.1 1340,3460 1409.37,3529.37 1469.37,3529.37 1530,3590 1630,3590 J5.1 ; v1(1905,3630) 2010,3630 2110,3730 2240,3730 2265,3755 2265,4415 2325,4475 v1(2510,4475) ; 2765,4725 v1(2765,4755) ; F5.2@3085,4707.99 v1(3085,4750) ; 3425,4695 F6.2 v1(3425,4750) ; 3736.73,4696.34 F7.2 3740,4712.6 v1(3740,4750) 3795,4750 3830,4715 J6.1 J6.3
  Bottom Layer w20: J5.1 1655,3580 1705,3630 v1(1905,3630) ; v1(2510,4475) 2510,4565 2700,4755 v1(2765,4755) 2770,4750 v1(3085,4750) v1(3425,4750) v1(3740,4750)
pads on no net: *56.3 *56.5 *56.6 *56.7 *57.BTNB J3.2 LED1.2 U1.7 U1.9 U2.9 U3.11 U3.14 U6.4 U7.4 U8.2 U8.3 U8.4 U*1.9 U*1.10 U*1.11 U*1.12 U*1.13 U*1.14
copper on no net:
  other v2: 1721.26,3118.54 1878.74,3118.54
  other v3: 3251.89,4039.41 3684.96,4039.41

## Polygon pours and split planes (outlines as drawn)
no net on Mechanical 1 "Mechanical 1-No Net" (solid): 1025,4600 1330,4600 1330,3920 1020,3920
GND on Top Layer "Top Layer-GND 1" (solid, pour order 0): 1020,4980 3960,4980 3960,2920 1020,2920
GND on Bottom Layer "Bottom Layer-GND" (solid, pour order 6): 1020,4980 3960,4980 3960,2925 1020,2925

## Keep-outs
Top Layer:
  rectangle: 1000,3925 1305,4595
Keep-Out Layer:
  rectangle: 1000,3935 1300,4585

## Other copper
Bottom Layer:
  text "I" at 2500,4685 h60
  text "VIN" at 3660,4655 h60 r180
  text "5V" at 3709.98,4335 h60 r180
  text "3V3" at 3650,3935 h60 r180
  text "GND" at 3650,3745 h60 r180
  text "5V" at 1595,3319.98 h60 r270
  text "VIN" at 1495,3270 h60 r270
  text "3V3" at 1695,3260 h60 r270
  text "SU1U4C" at 3515,3155 h60 r270
  text "2019" at 3620,3155 h60 r270
  text "HomeAUT" at 3725,3155 h60 r270
  text "+" at 2840,3090 h60 r90

## Silkscreen, mask and mechanical layers (free items; w line width, h text height)
Top Solder:
  the board outline again, w10
Drill Guide:
  pour cut-out: 1330,4610 1330,3915 1335,3910 1000,3910 1000,4610

## Text inside footprints (layer, text, board x,y; h text height)
*: Bottom Overlay "OLED 128x64" at 1545,4515 h60 r180
U*1: Mechanical 13 "ANTENNA AREA" at 1054.76,3950.67 h10 r90; Mechanical 13 "CUTOUT POLYGON" at 1074.76,3950.67 h10 r90